# EAGLE board Ryan and Jimmy Schematic Attempt (EAGLE 9.2.2)

Size 160 x 100 mm. Coordinates in mm from the lower left corner, seen from the top.
Outline: 0,0 160,0 160,100 0,100 0,0
Copper layers (1*16): Top 0.035mm / dielectric 1.5mm / Bottom 0.035mm
Design rules "default": minimum track width 6mil, minimum drill 0.35mm, track to track 6mil, track to pad 6mil, pad to pad 6mil, via to via 6mil, smd to smd 6mil, copper to edge 40mil, drill to drill 6mil, minimum pad ring 10mil, minimum via ring 8mil, stop-mask expansion 4mil, vias tented up to drill 0mil, thermal gap 10mil

## Footprints (pad centres in the part's own frame; a part is rotated, then mirrored left to right if it is on the bottom)
SPC4078 = drill 0.8 pad 2.184 long: 1 -3,0; 2 0,-4.8 | drill 1 pad 2.184 long: 3 3,0
C025-024X044 = drill 0.813 octagon: 1 -1.27,0; 2 1.27,0
DO214BA = smd 1.8 x 1.7: A 2.05,0; C -2.05,0
TO220H = drill 1.118 long: 1 -2.54,-10.16; 2 0,-10.16; 3 2.54,-10.16 | hole 3.302: 0,4.826
AVRISP = drill 0.9 pad 1.626: 1 -1.27,2.54; 2 1.27,2.54; 3 -1.27,0; 4 1.27,0; 5 -1.27,-2.54; 6 1.27,-2.54
CHIPLED_0805 = smd 1.2 x 1.2: A 0,-1.05; C 0,1.05
Q = drill 0.61 long: 1 -2.54,-7.62; 2 2.54,-7.62
R0805 = smd 1.3 x 1.5: 1 -0.95,0; 2 0.95,0
CAY16 = smd 0.5 x 0.65: 1 -1.2,-0.675; 2 -0.4,-0.675; 3 0.4,-0.675; 4 1.2,-0.675; 5 1.2,0.675; 6 0.4,0.675; 7 -0.4,0.675; 8 -1.2,0.675
TO18 = drill 0.813 octagon: 1 -1.27,-1.27; 2 1.27,-1.27; 3 1.27,1.27
QFP80P900X900X120-32N = smd 1.6 x 0.55: 1 -4.18,2.8; 2 -4.18,2; 3 -4.18,1.2; 4 -4.18,0.4; 5 -4.18,-0.4; 6 -4.18,-1.2; 7 -4.18,-2; 8 -4.18,-2.8; 17 4.18,-2.8; 18 4.18,-2; 19 4.18,-1.2; 20 4.18,-0.4; 21 4.18,0.4; 22 4.18,1.2; 23 4.18,2; 24 4.18,2.8 | smd 0.55 x 1.6: 9 -2.8,-4.18; 10 -2,-4.18; 11 -1.2,-4.18; 12 -0.4,-4.18; 13 0.4,-4.18; 14 1.2,-4.18; 15 2,-4.18; 16 2.8,-4.18; 25 2.8,4.18; 26 2,4.18; 27 1.2,4.18; 28 0.4,4.18; 29 -0.4,4.18; 30 -1.2,4.18; 31 -2,4.18; 32 -2.8,4.18
W237-103 = drill 1.194 long: 1 -5,-1.29; 2 0,-1.29; 3 5,-1.29
W237-102 = drill 1.194 long: 1 -2.5,-1.27; 2 2.5,-1.27
1751264 = drill 1.1 pad 1.7: 1 -5.25,-0.1; 2 -1.75,-0.1; 3 1.75,-0.1; 4 5.25,-0.1
332-02 = drill 0.9 pad 1.27: 1 0,-1; 2 0,1

## Placement (x,y rotation side)
BARREL_JACK  [SPC4078]  -52.07,22.86 0 top  (outside the outline)
C1  220  [C025-024X044]  -171.45,-66.04 0 top  (outside the outline)
C2  220  [C025-024X044]  -64.77,48.26 0 top  (outside the outline)
C3  220  [C025-024X044]  -171.45,-73.66 0 top  (outside the outline)
C4  220  [C025-024X044]  -15.24,57.15 0 top  (outside the outline)
C5  220  [C025-024X044]  -20.32,57.15 0 top  (outside the outline)
C6  220  [C025-024X044]  -25.4,57.15 0 top  (outside the outline)
C7  220  [C025-024X044]  -30.48,57.15 0 top  (outside the outline)
C8  47 uF  [C025-024X044]  -171.45,-81.28 0 top  (outside the outline)
C9  220  [C025-024X044]  -182.88,-88.9 0 top  (outside the outline)
C10  220  [C025-024X044]  -40.64,57.15 0 top  (outside the outline)
C11  220  [C025-024X044]  -45.72,57.15 0 top  (outside the outline)
C12  220  [C025-024X044]  -182.88,-96.52 0 top  (outside the outline)
D1  [DO214BA]  -62.23,62.23 0 top  (outside the outline)
IC2  7805T  [TO220H]  -166.37,-49.53 0 top  (outside the outline)
ISP1  AVRISP-6  [AVRISP]  -152.4,-52.07 0 top  (outside the outline)
LED2  Green  [CHIPLED_0805]  -26.67,62.23 0 top  (outside the outline)
Q1  [Q]  -180.34,-74.93 0 top  (outside the outline)
R1  220  [R0805]  -52.07,57.15 0 top  (outside the outline)
R2  220  [R0805]  -57.15,57.15 0 top  (outside the outline)
R3  10k  [R0805]  -16.51,63.5 0 top  (outside the outline)
R4  220  [R0805]  -67.31,-3.81 0 top  (outside the outline)
R6  220  [R0805]  -62.23,57.15 0 top  (outside the outline)
R7  220  [R0805]  -67.31,57.15 0 top  (outside the outline)
R8  10k  [R0805]  -21.59,63.5 0 top  (outside the outline)
RN1  [CAY16]  -182.88,-102.87 0 top  (outside the outline)
T1  2N2222  [TO18]  -40.64,63.5 0 top  (outside the outline)
T2  2N2222  [TO18]  -54.61,63.5 0 top  (outside the outline)
U1  ATMEGA328PB-AU  [QFP80P900X900X120-32N]  -91.44,-15.24 0 top  (outside the outline)
X1  [W237-103]  -120.65,-39.37 0 top  (outside the outline)
X2  [W237-102]  -133.35,-48.26 0 top  (outside the outline)
X3  [W237-103]  -120.65,-26.67 0 top  (outside the outline)
X4  [W237-102]  -102.87,-13.97 0 top  (outside the outline)
X5  1X04_35MM_SCREW  [1751264]  -118.11,-53.34 0 top  (outside the outline)
X6  [W237-102]  -143.51,-48.26 0 top  (outside the outline)
X8  [W237-102]  -123.19,-13.97 0 top  (outside the outline)
X9  332-02  [332-02]  -36.83,49.53 0 top  (outside the outline)
X10  332-02  [332-02]  -44.45,49.53 0 top  (outside the outline)

## Library data of the parts
BARREL_JACK = con-jack; OC_FARNELL: unknown; OC_NEWARK: unknown
C1-C12 = rcl; SPICEPREFIX: C
D1 = diode
IC2 ISP1 = ECE388
LED2 = led
Q1 = special
R1-R4 R6-R8 = rcl; SPICEPREFIX: R
RN1 = resistor-dil; OC_FARNELL: unknown; OC_NEWARK: unknown
T1 T2 = transistor-neu-to92
U1 = ATMEGA328PB-AU; AVAILABILITY: Unavailable; DESCRIPTION: AVR microcontroller; EEPROM: 1024B; SRAM: 2kB; Flash: 32kB; TQFP32; MF: Microchip; MP: ATMEGA328PB-AU; PACKAGE: TQFP-32 Microchip; PRICE: None
X1 X3 = ECE388; MPN: 237-103; OC_FARNELL: unknown; OC_NEWARK: 18M7116
X2 X4 X6 X8 = ECE388; MPN: 237-102; OC_FARNELL: unknown; OC_NEWARK: 70K9898
X5 = ECE388; MPN: 1751264; OC_FARNELL: unknown; OC_NEWARK: 10R0934
X9 X10 = con-garry

## Nets
AVCC: U1.18
N$1: BARREL_JACK.3 D1.A
N$2: R2.1 X5.1
N$3: T2.1 X6.1
N$4: R3.2 T2.2 X2.1
N$5: R4.2 U1.25
N$6: ISP1.4 U1.22
N$7: BARREL_JACK.1 BARREL_JACK.2 C1.1 C2.1 C3.1 C4.1 C5.1 C6.1 C7.1 C8.1 C9.2 C10.1 C11.1 C12.2 IC2.2 ISP1.6 T1.1 U1.5 U1.21 X1.1 X2.2 X3.1 X4.1 X5.2 X6.2 X8.1
N$8: C11.2 U1.16 X3.3
N$9: C7.2 R2.2 U1.1
N$10: C10.2 U1.12 X8.2
N$11: R4.1 T1.2
N$12: C5.2 R7.2 U1.10
N$13: C4.2 R6.2 U1.9
N$14: R6.1 X5.3
N$15: R7.1 X5.4
N$16: LED2.C X9.1
N$17: T1.3 X9.2
N$18: C9.1 Q1.2 U1.7
N$19: LED2.A R1.1
N$20: C12.1 Q1.1 U1.8
N$21: R1.2 X10.1
N$22: C1.2 C8.2 D1.C IC2.1 X10.2
N$23: ISP1.5 RN1.1 U1.29
N$24: C3.2 IC2.3 ISP1.2 R3.1 R8.2 RN1.8 T2.3 U1.4 X1.3 X3.2
N$25: C6.2 R8.1 U1.32 X1.2
N$26: C2.2 U1.11 X4.2
N$27: ISP1.3 U1.24
N$28: ISP1.1 U1.23

## Tracks (layer width: path | path; a pad name or v marks a point on that pad's centre or on a via)
N$1  (1 unrouted)
N$2  (1 unrouted)
N$3  (1 unrouted)
N$4  (2 unrouted)
N$5  (1 unrouted)
N$6  (1 unrouted)
N$7  (25 unrouted)
N$8  (2 unrouted)
N$9  (2 unrouted)
N$10  (2 unrouted)
N$11  (1 unrouted)
N$12  (2 unrouted)
N$13  (2 unrouted)
N$14  (1 unrouted)
N$15  (1 unrouted)
N$16  (1 unrouted)
N$17  (1 unrouted)
N$18  (2 unrouted)
N$19  (1 unrouted)
N$20  (2 unrouted)
N$21  (1 unrouted)
N$22  (4 unrouted)
N$23  (2 unrouted)
N$24  (9 unrouted)
N$25  (3 unrouted)
N$26  (2 unrouted)
N$27  (1 unrouted)
N$28  (1 unrouted)